# Altium PCB main_board.PcbDoc (part 1 of 2)
Units mm, origin at the board's own origin, x right, y up, seen from the top; angles counter-clockwise.
Board outline 279.4 x 215.91 mm, 2 copper layers (Top Layer, Bottom Layer), stack 2.452 mm thick; 96 components, 340 nets, 967 pads, 108 vias.
Unrouted connection lines stored in the file: 86.
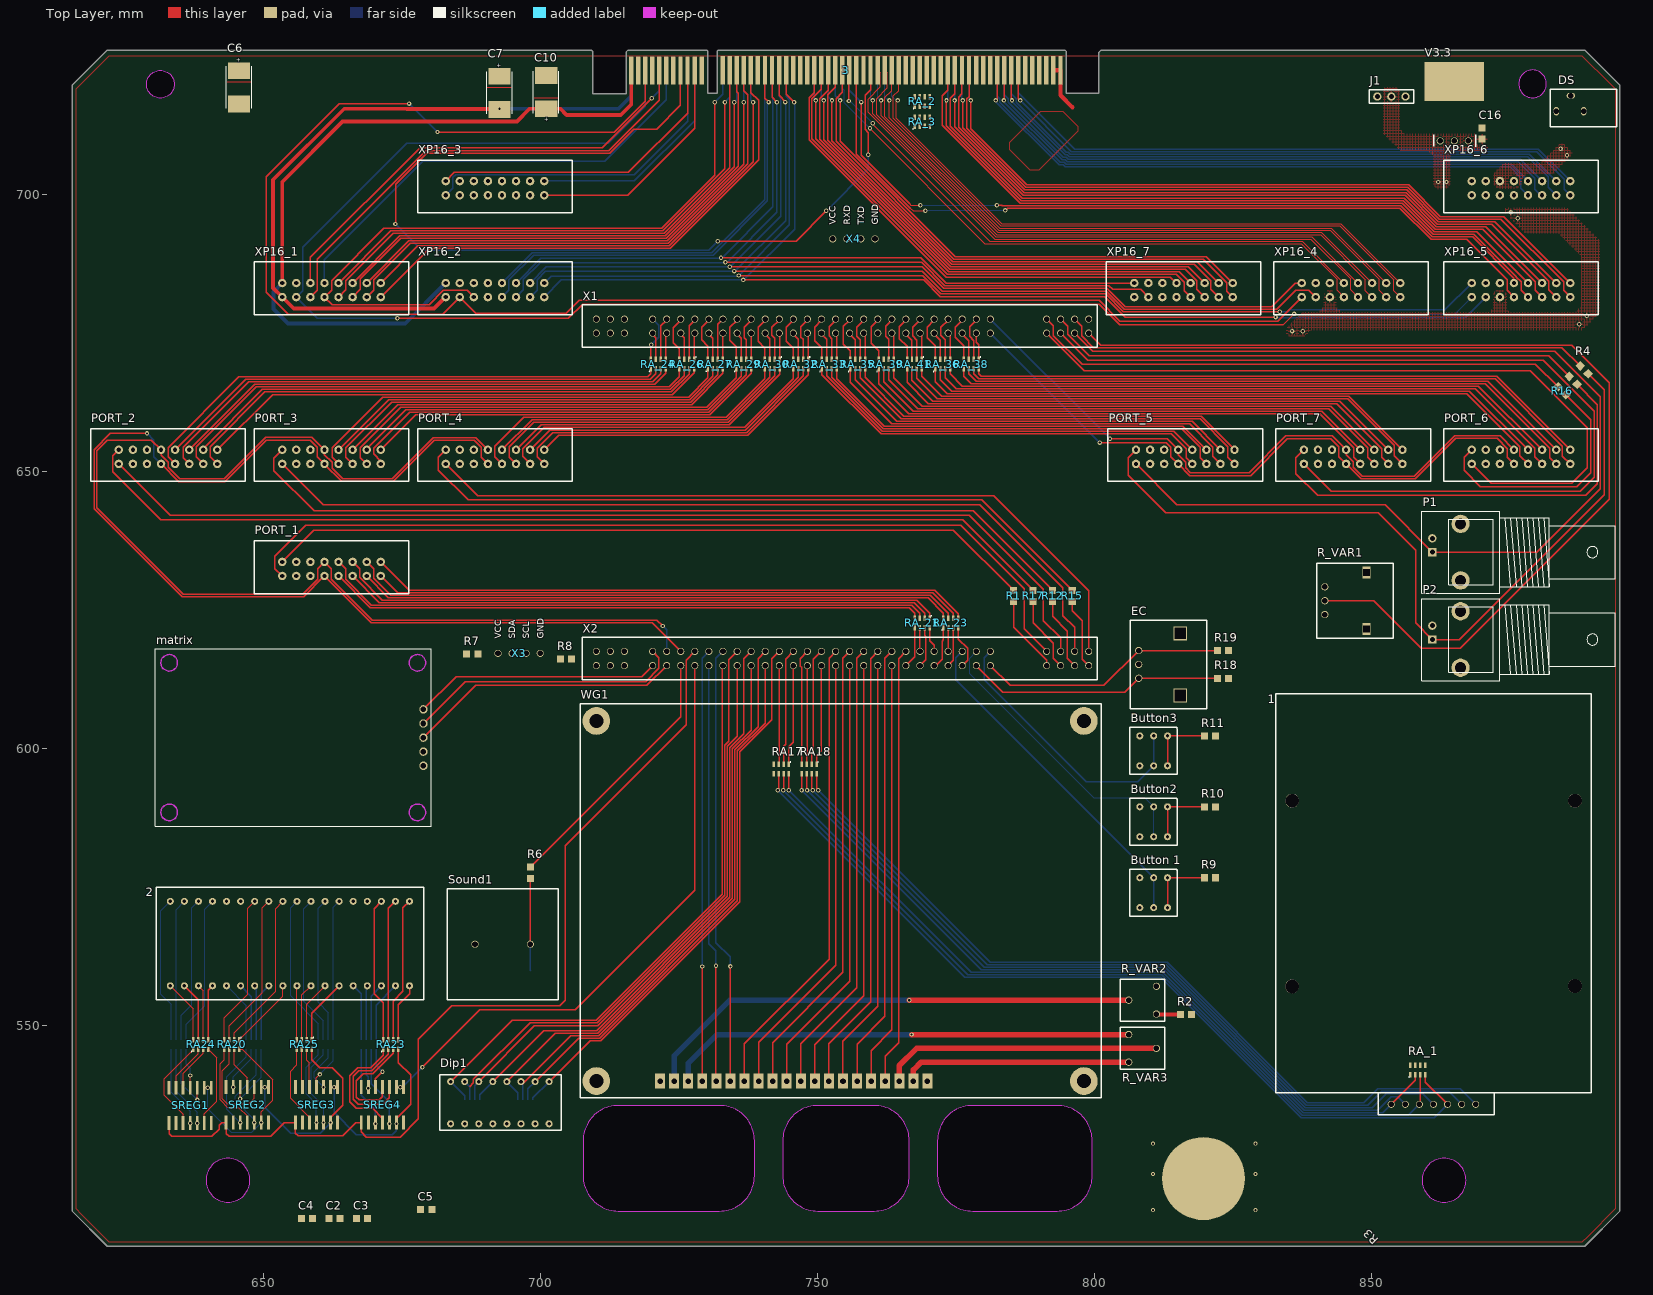
[diagram p0: Top Layer view]
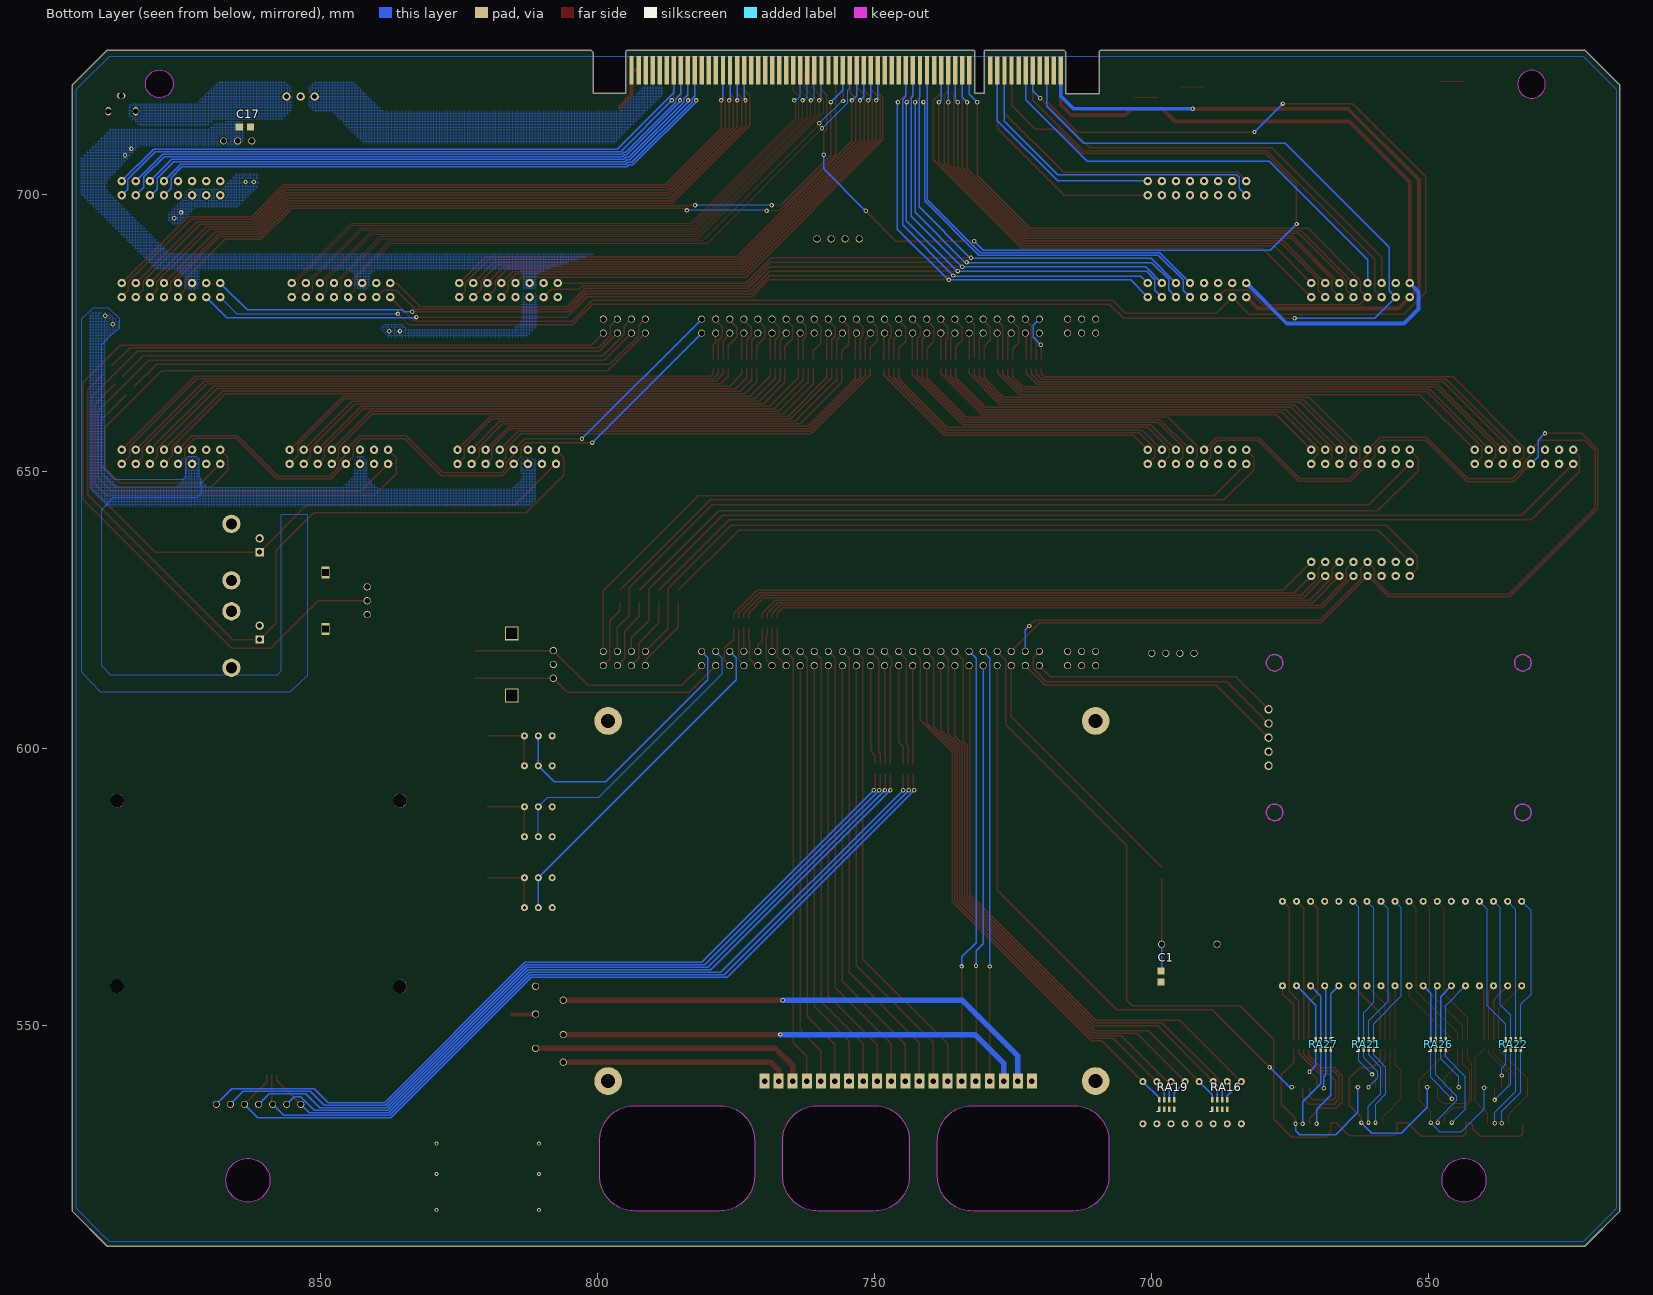
[diagram p1: Bottom Layer view, seen from below]

## Layer stack, top to bottom
Top Solder: solder mask 0.0102, Solder Resist, Dk 3.5
Top Layer: signal copper 0.0356
Dielectric1: core 2, FR-4, Dk 4.8
Dielectric 3: prepreg 0.127, Dk 4.2
Dielectric 2: core 0.254, Dk 4.2
Bottom Layer: signal copper 0.0356
Bottom Solder: solder mask 0.0102, Solder Resist, Dk 3.5

## Board outline
615.365,516.537 621.715,510.187 888.415,510.187 894.765,516.537 894.765,719.737 888.415,726.087 801.117,726.087 800.7,725.67 800.7,718.3 794.8,718.3 794.8,725.9 794.6,726.1 732,726.1 731.8,725.9 731.8,718.3 730.1,718.3 730.1,725.9 729.913,726.087 715.697,726.087 715.445,725.835 715.445,718.217 709.345,718.217 709.345,725.825 709.083,726.087 621.715,726.087 615.365,719.737
cut-out: 859.055,522.097 ccw(c863.015,522.097) 863.015,518.137 ccw(c863.015,522.097) 866.975,522.097 ccw(c863.015,522.097) 863.015,526.057 ccw(c863.015,522.097)
cut-out: 639.555,522.097 ccw(c643.515,522.097) 643.515,518.137 ccw(c643.515,522.097) 647.475,522.097 ccw(c643.515,522.097) 643.515,526.057 ccw(c643.515,522.097)
cut-out: 876.5,720 ccw(c879,720) 879,717.5 ccw(c879,720) 881.5,720 ccw(c879,720) 879,722.5 ccw(c879,720)
cut-out: 771.575,522.887 ccw(c777.925,522.887) 777.925,516.537 793.165,516.537 ccw(c793.165,522.887) 799.515,522.887 799.515,529.237 ccw(c793.165,529.237) 793.165,535.587 777.925,535.587 ccw(c777.925,529.237) 771.575,529.237
cut-out: 743.635,522.887 ccw(c749.985,522.887) 749.985,516.537 760.145,516.537 ccw(c760.145,522.887) 766.495,522.887 766.495,529.237 ccw(c760.145,529.237) 760.145,535.587 749.985,535.587 ccw(c749.985,529.237) 743.635,529.237
cut-out: 713.965,516.537 732.205,516.537 ccw(c732.205,522.887) 738.555,522.887 738.555,529.237 ccw(c732.205,529.237) 732.205,535.587 713.965,535.587 ccw(c713.965,529.237) 707.615,529.237 707.615,522.887 ccw(c713.965,522.887)
cut-out: 631.308,717.426 cw(c631.308,719.926) 628.808,719.926 cw(c631.308,719.926) 631.308,722.426 cw(c631.308,719.926) 633.808,719.926 cw(c631.308,719.926)

## Design rules (kind name [scope] priority, off if disabled: settings)
BoardOutlineClearance [All] p1: gap=0.7 ignorepadtopadclearanceinfootprint=FALSE
Clearance [All] p1: gap=0.2 ignorepadtopadclearanceinfootprint=FALSE except(0: Arc-Hole Track-Hole SMDPad-Hole THPad-Hole Via-Hole Fill-Hole Poly-Hole Region-Hole Text-Hole)
ComponentClearance [All] p1: gap=-1 collisioncheckmode=3 verticalgap=0.254 showdistances=FALSE
HoleSize [All] p1: absolutevalues=TRUE maxlimit=5.1 minlimit=0.3 maxpercent=80.000 minpercent=20.000
MinimumSolderMaskSliver [All] p1: minsoldermaskwidth=0.15
PasteMaskExpansion [All] p1: expansion=0.2
PlaneClearance [All] p1: clearance=0.2
PolygonConnect PolygonConnect_2 [All vs IsNamedPolygon('VCC2.5')] p1: connectstyle=Direct reliefconductorwidth=0.254 reliefentries=4 polygonreliefangle="90 Angle" airgapwidth=0.254
PolygonConnect PolygonConnect_1 [All vs IsNamedPolygon('VCC1.8')] p2: connectstyle=Direct reliefconductorwidth=0.254 reliefentries=4 polygonreliefangle="90 Angle" airgapwidth=0.254
PolygonConnect 3.3connect [All vs IsNamedPolygon('vcc3.3')] p3: connectstyle=Direct reliefconductorwidth=0.254 reliefentries=4 polygonreliefangle="90 Angle" airgapwidth=0.254
PolygonConnect pcon [All vs IsNamedPolygon('GND_Poly')] p4: connectstyle=Direct reliefconductorwidth=0.254 reliefentries=4 polygonreliefangle="90 Angle" airgapwidth=0.254
PolygonConnect poly_connect [All vs IsNamedPolygon('GND_Poly') Or  IsNamedPolygon('VCC5_Polygon')] p5: connectstyle=Direct reliefconductorwidth=0.254 reliefentries=4 polygonreliefangle="90 Angle" airgapwidth=0.254
PolygonConnect [All] p6: connectstyle=Relief reliefconductorwidth=0.254 reliefentries=4 polygonreliefangle="90 Angle" airgapwidth=0.254
RoomDefinition main_connector [InComponentClass('main_connector')] p1: confinementstyle=ConfineOut formatcopy=TRUE lockcomponents=FALSE outline -24.5,-24.5 26.3,-24.5 26.3,0.9 -24.5,0.9
RoutingVias [All] p1: holewidth=0.4 width=0.8 viastyle="Through Hole" minholewidth=0.4 minwidth=0.7 maxholewidth=0.4 maxwidth=0.8
SilkToSolderMaskClearance SilkscreenOverComponentPads [IsPad] p1: minsilkscreentomaskgap=0.254 clearancetoexposedcopper=TRUE
SolderMaskExpansion [All] p1: expansion=0.1
Width Width_VCC3.3 [InNet('VCC3.3')] p1: maxlimit=2 minlimit=0.254 preferedwidth=0.254
Width Width_VCC5 [InNet('VCC5')] p2: maxlimit=2 minlimit=0.2 preferedwidth=0.7 minimp=50.000000 maximp=50.000000 favimp=50.000000
Width [All] p3: maxlimit=2 minlimit=0.2 preferedwidth=0.254
24 further rules are at their usual default settings.

## Classes and differential pairs
component class elv_connector: 3 RA_2 RA_3 XP16_1 XP16_2 XP16_3 XP16_4 XP16_5 XP16_6 XP16_7
component class main_connector: X1 X2
component class board_ports: P0RT_3 P1 P2 PORT_1 PORT_2 PORT_4 PORT_5 PORT_6 PORT_7 R1 R3 R4 R12 R15 R16 R17 RA_21 RA_23 RA_24 RA_26 RA_27 RA_29 RA_30 RA_32 RA_33 RA_35 RA_36 RA_38 RA_39 RA_41
component class power: C6 C7 C10 C16 C17 C18 C19 DS J1 R50 V3.3
component class periphery: 1 Button2 Button3 "Button 1" C1 Dip1 EC matrix R2 R6 R7 R8 R9 R10 R11 R18 R19 R_VAR1 R_VAR2 R_VAR3 RA16 RA17 RA18 RA19 RA_1 Reset Sound1 WG1 X3 X4
component class 7SEG: 2 C2 C3 C4 C5 RA20 RA21 RA22 RA23 RA24 RA25 RA26 RA27 SREG1 SREG2 SREG3 SREG4

## Components (designator, comment, footprint, x,y, rotation, side; value= is the part's Value field where it differs from the comment)
1 "AK207" AK-207 861.1,573.9 r0 top locked
2 "CA56-11EWA" CA56-11EWA 633.1,557.2 r0 top locked
3 "PCI" PCI-120 716.3,722.6 r0 top locked
Button2 "ps850l" ps850l 810.6,586.8 r0 top
Button3 "ps850l" ps850l 810.6,599.6 r0 top
"Button 1" "ps850l" ps850l 810.6,574 r0 top
C1 "CAPACITY" R0805 698.2,557.9 r90 bottom
C2 "CAPACITY" R0805 661.75,515.227 r0 top
C3 "CAPACITY" R0805 666.7,515.227 r0 top
C4 "CAPACITY" R0805 656.799,515.227 r0 top
C5 "CAPACITY" R0805 678.3,516.8 r0 top
C6 "C_Ta" C_Ta 645.5,719.352 r270 top
C7 "C_Ta" C_Ta 692.5,718.363 r270 top
C10 "C_Ta" C_Ta 700.951,718.5 r90 top
C16 "10uF" R0805 869.9,710 r90 top
C17 "10uF" R0805 864.586,712.2 r180 bottom
Dip1 "DIP" SWD1-8 683.7,536.1 r0 top
DS "DS-313a" DS-313 894.2,715.061 r180 top
EC "EC12" EC 807.9,615.2 r270 top
J1 "JUMPER_SWITCH_2S" JUMPER_SWITCH_2S 853.5,717.7 r180 top
matrix "LED_MATRIX" LED_MATRIX 678.8,602 r90 top
P0RT_3 "Вилка_16" DS1013-16 662.2,651.4 r180 top
P1 "BNC" "BNC_RA CON" 860.9,635.471 r180 top locked
P2 "BNC" "BNC_RA CON" 860.9,619.7 r180 top locked
PORT_1 "Вилка_16" DS1013-16 662.2,631.173 r180 top
PORT_2 "Вилка_16" DS1013-16 632.7,651.4 r180 top
PORT_4 "Вилка_16" DS1013-16 691.7,651.4 r180 top
PORT_5 "Вилка_16" DS1013-16 816.3,651.4 r180 top locked
PORT_6 "Вилка_16" DS1013-16 876.9,651.4 r180 top
PORT_7 "Вилка_16" DS1013-16 846.6,651.4 r180 top
R1 "*" R0805 785.3,628.561 r270 top
R2 "*" R0805 815.4,552 r0 top
R3 "*" R0805 887.014,665.771 r135 top
R4 "*" R0805 889.014,667.656 r135 top
R6 "*" R0805 698.1,578.6 r270 top
R7 "*" R0805 686.6,617.1 r0 top
R8 "*" R0805 703.5,616.2 r0 top
R9 "*" R0805 821.8,576.7 r180 top
R10 "*" R0805 821.8,589.5 r180 top
R11 "*" R0805 821.8,602.3 r180 top
R12 "*" R0805 792.367,628.561 r270 top
R15 "*" R0805 795.9,628.561 r270 top
R16 "*" R0805 885.014,663.886 r135 top
R17 "*" R0805 788.833,628.561 r270 top
R18 "*" R0805 822.1,612.7 r0 top
R19 "*" R0805 822.1,617.7 r0 top
R_VAR1 "RV09" RV09 841.5,626.7 r270 top
R_VAR2 "RM065" RM065 811.1,554.6 r90 top
R_VAR3 "RM065" RM065 806.1,545.9 r270 top
RA16 "Bourns CAT16-102J4LF_1" CAT16-102J4_NEW 687.6,535.8 r90 bottom
RA17 "Bourns CAT16-102J4LF_1" CAT16-102J4_NEW 743.4,596.3 r270 top
RA18 "Bourns CAT16-102J4LF_1" CAT16-102J4_NEW 748.4,596.3 r270 top
RA19 "Bourns CAT16-102J4LF_1" CAT16-102J4_NEW 697.2,535.8 r90 bottom
RA20 "Bourns CAT16-102J4LF_1" CAT16-102J4_NEW 644.2,546.6 r270 top
RA21 "Bourns CAT16-102J4LF_1" CAT16-102J4_NEW 661.2,546.6 r90 bottom
RA22 "Bourns CAT16-102J4LF_1" CAT16-102J4_NEW 634.6,546.6 r90 bottom
RA23 "Bourns CAT16-102J4LF_1" CAT16-102J4_NEW 672.9,546.6 r90 top
RA24 "Bourns CAT16-102J4LF_1" CAT16-102J4_NEW 638.6,546.6 r90 top
RA25 "Bourns CAT16-102J4LF_1" CAT16-102J4_NEW 657.3,546.6 r270 top
RA26 "Bourns CAT16-102J4LF_1" CAT16-102J4_NEW 648.2,546.6 r90 bottom
RA27 "Bourns CAT16-102J4LF_1" CAT16-102J4_NEW 668.9,546.6 r270 bottom
RA_1 "Bourns CAT16-102J4LF_1" CAT16-102J4_NEW 858.3,542 r90 top
RA_2 "Bourns CAT16-102J4LF_1" CAT16-102J4_NEW 768.85,716.833 r90 top
RA_3 "Bourns CAT16-102J4LF_1" CAT16-102J4_NEW 768.8,713.154 r90 top
RA_21 "Bourns CAT16-102J4LF_1" CAT16-102J4_NEW 768.8,622.7 r270 top
RA_23 "Bourns CAT16-102J4LF_1" CAT16-102J4_NEW 774,622.7 r90 top
RA_24 "Bourns CAT16-102J4LF_1" CAT16-102J4_NEW 721.2,669.4 r90 top
RA_26 "Bourns CAT16-102J4LF_1" CAT16-102J4_NEW 726.336,669.4 r270 top
RA_27 "Bourns CAT16-102J4LF_1" CAT16-102J4_NEW 731.473,669.4 r90 top
RA_29 "Bourns CAT16-102J4LF_1" CAT16-102J4_NEW 736.609,669.4 r90 top
RA_30 "Bourns CAT16-102J4LF_1" CAT16-102J4_NEW 741.745,669.4 r270 top
RA_32 "Bourns CAT16-102J4LF_1" CAT16-102J4_NEW 746.882,669.4 r270 top
RA_33 "Bourns CAT16-102J4LF_1" CAT16-102J4_NEW 752.018,669.4 r90 top
RA_35 "Bourns CAT16-102J4LF_1" CAT16-102J4_NEW 757.155,669.4 r90 top
RA_36 "Bourns CAT16-102J4LF_1" CAT16-102J4_NEW 772.5,669.4 r90 top
RA_38 "Bourns CAT16-102J4LF_1" CAT16-102J4_NEW 777.7,669.4 r270 top
RA_39 "Bourns CAT16-102J4LF_1" CAT16-102J4_NEW 762.291,669.4 r90 top
RA_41 "Bourns CAT16-102J4LF_1" CAT16-102J4_NEW 767.427,669.4 r270 top
Sound1 "SCS-17-P10" SCS-17-P10 688.1,564.7 r0 top
SREG1 "M74HC595B1R" SN74HC164DRX 640.5,539.5 r180 top
SREG2 "M74HC595B1R" SN74HC164DRX 650.8,539.6 r180 top
SREG3 "M74HC595B1R" SN74HC164DRX 663.3,539.6 r180 top
SREG4 "M74HC595B1R" SN74HC164DRX 675.2,539.6 r180 top
V3.3 "LM1085" LM1085 862.32,709.7 r0 top
WG1 "MT6464b" WG12864A 710,540 r0 top locked
X1 "CONNECTOR_TOP" Connector 710,675 r0 top locked
X2 "CONNECTOR_BOTTOM" Connector 710,615 r0 top locked
X3 "I2C" I2C_CON 692.249,617.2 r0 top
X4 "UART_CON" UART_CON 752.681,692 r0 top
XP16_1 "Вилка_16" DS1013-16 662.2,681.5 r180 top
XP16_2 "Вилка_16" DS1013-16 691.7,681.5 r180 top
XP16_3 "Вилка_16" DS1013-16 691.7,699.9 r180 top
XP16_4 "Вилка_16" DS1013-16 846.21,681.5 r180 top locked
XP16_5 "Вилка_16" DS1013-16 876.9,681.5 r180 top locked
XP16_6 "Вилка_16" DS1013-16 876.9,699.9 r180 top locked
XP16_7 "Вилка_16" DS1013-16 815.992,681.5 r180 top

## Footprints (in the part's own frame and the unit in brackets; to place one, negate y for a bottom-side part, rotate by r counter-clockwise, add the part's x,y. Pads: shape width x height; smd on the part's side, far side on the other; paste and mask are expansions set on the pad)
AK-207 [mm]
  round 1.27 / inner round 1.524 / far side round 1.27 hole 1: 1(-7.62,-38.1) 2(-5.08,-38.1) 3(-2.54,-38.1) 4(0,-38.1) 5(2.54,-38.1) 6(5.08,-38.1) 7(7.62,-38.1)
  round 2.5 hole 2.5 unplated: h1(25.525,-16.75)
  round 2.5 hole 2.5: h2(25.525,16.7) h3(-25.5,16.7) h4(-25.5,-16.8)
  silkscreen extent -28.5,-40 28.5,36
"BNC_RA CON" [mm] "Connector; BNC Elbow"
  rect 1.5x1.5 hole 0.9: 1(0,0)
  round 3.3 hole 2: 2(-5.1,5.1) 2(-5.1,-5.1)
  round 1.5 hole 0.9: 2(0,-2.5)
  silkscreen extent -33,-7.4 1.9,7.4
C_Ta [mm]
  rect 3x4 smd: 1(-3,0) 2(3,0)
  Top Layer lines w0.2: -1.016,-2.159 -1.016,2.159
  silkscreen extent -3.8,-2.3 3.8,2.3, body extent -3.8,-2.3 3.8,2.3, height 4.3
CA56-11EWA [mm]
  round 1.27 / inner round 0.8 / far side round 1.27 hole 0.6: 1(0,0) 2(2.54,0) 3(5.08,0) 4(7.62,0) 5(10.16,0) 6(12.7,0) 7(15.24,0) 8(17.78,0) 9(20.32,0) 10(22.86,0) 11(25.4,0) 12(27.94,0) 13(30.48,0) 14(33.02,0) 15(35.56,0) 16(38.1,0) 17(40.64,0) 18(43.18,0) 19(43.18,15.24) 20(40.64,15.24) 21(38.1,15.24) 22(35.56,15.24) 23(33.02,15.24) 24(30.48,15.24) 25(27.94,15.24) 26(25.4,15.24) 27(22.86,15.24) 28(20.32,15.24) 29(17.78,15.24) 30(15.24,15.24) 31(12.7,15.24) 32(10.16,15.24) 33(7.62,15.24) 34(5.08,15.24) 35(2.54,15.24) 36(0,15.24)
  silkscreen extent -2.54,-2.54 45.72,17.78
CAT16-102J4_NEW [mm] "Resistor Chip Array, Concave, 8-Leads, Pitch 0,90mm,  Body 3,20x1,55mm,  IPC Medium Density"
  rect 1x0.45 smd: 0(-0.85,-1.35) 1(-0.85,-0.45) 2(-0.85,0.45) 3(-0.85,1.35) 4(0.85,1.35) 5(0.85,0.45) 6(0.85,-0.45) 7(0.85,-1.35)
  silkscreen extent -1.34,1.59 -1.24,1.69, body extent -0.9,-1.7 0.9,1.7, height 0.5
Connector [mm] "MCU/FPGA board connector"
  round 1.27 / inner round 0.8 / far side round 1.27 hole 1: 0(0,2.54) 1(2.54,2.54) 2(5.08,2.54) 3(10.16,2.54) 4(12.7,2.54) 5(15.24,2.54) 6(17.78,2.54) 7(20.32,2.54) 8(22.86,2.54) 9(25.4,2.54) 10(27.94,2.54) 11(30.48,2.54) 12(33.02,2.54) 13(35.56,2.54) 14(38.1,2.54) 15(40.64,2.54) 16(43.18,2.54) 17(45.72,2.54) 18(48.26,2.54) 19(50.8,2.54) 20(53.34,2.54) 21(55.88,2.54) 22(58.42,2.54) 23(60.96,2.54) 24(63.5,2.54) 25(66.04,2.54) 26(68.58,2.54) 27(71.12,2.54) 28(81.275,2.54) 29(83.795,2.54) 30(86.325,2.54) 31(88.875,2.54) 32(88.875,0) 33(86.325,0) 34(83.795,0) 35(81.275,0) 36(71.12,0) 37(68.58,0) 38(66.04,0) 39(63.5,0) 40(60.96,0) 41(58.42,0) 42(55.88,0) 43(53.34,0) 44(50.8,0) 45(48.26,0) 46(45.72,0) 47(43.18,0) 48(40.64,0) 49(38.1,0) 50(35.56,0) 51(33.02,0) 52(30.48,0) 53(27.94,0) 54(25.4,0) 55(22.86,0) 56(20.32,0) 57(17.78,0) 58(15.24,0) 59(12.7,0) 60(10.16,0) 61(5.08,0) 62(2.54,0) 63(0,0)
  silkscreen extent -2.54,-2.54 90.42,5.08
DS1013-16 [mil]
  round 60 hole 30: 1(-350,-100) 2(-350,0) 3(-250,-100) 4(-250,0) 5(-150,-100) 6(-150,0) 7(-50,-100) 8(-50,0) 9(50,-100) 10(50,0) 11(150,-100) 12(150,0) 13(250,-100) 14(250,0) 15(350,-100) 16(350,0)
  silkscreen extent -550,-250 550,125
DS-313 [mm]
  oval 1x1.5 / inner round 1.524 / far side oval 1x1.5 hole 1: 0(6,0) 1(10.9,0)
  oval 1.5x1 / inner round 1.524 / far side oval 1.5x1 hole 1: 0(8.3,-2.8)
  silkscreen extent 0,-4 12,2.8
EC [mm] "EC12 rotary encoder"
  rect 2.5x2.5 hole 2 square: 0(-5.6,7.5) 0(5.6,7.5)
  round 1.3 hole 1: 1(-2.5,0) 2(0,0) 3(2.5,0)
  silkscreen extent -8,-1.5 8,12.3
I2C_CON [mm] "I2C pls connector"
  round 1.27 / inner round 1.524 / far side round 1.27 hole 1: 1(0,0) 2(2.54,0) 3(5.08,0) 4(7.62,0)
JUMPER_SWITCH_2S [mm] "2 state jumper switch"
  round 1.5 hole 0.9: 0(0,0) 1(-2.54,0) 2(2.54,0)
  silkscreen extent -4,-1.25 4,1.25
LED_MATRIX [mil]
  round 60 hole 39.37: 1(-200,0) 2(-100,0) 3(0,0) 4(100,0) 5(200,0)
  Keep-Out Layer circle w10: c531.5,1807.09 r59.06
  Keep-Out Layer circle w10: c-531.5,1807.09 r59.06
  Keep-Out Layer circle w10: c531.5,43.31 r59.06
  Keep-Out Layer circle w10: c-531.5,43.31 r59.06
  silkscreen extent -630,-55 630,1906
LM1085 [mm]
  round 1.27 / inner oval 0.4x0.3 / far side round 1.27 hole 1 mask+0.05: 0(0,0) 1(2.54,0) 2(5.08,0)
  rect 10.8x7 smd mask+0.05: 1(2.54,10.7)
  silkscreen extent -1.2,-1.1 6.4,1.14
PCI-120 [mm]
  rect 0.8x5.08 smd mask+0.05: 0(0,-0.2) 1(1.27,-0.2) 2(2.54,-0.2) 3(3.81,-0.2) 4(5.08,-0.2) 5(6.35,-0.2) 6(7.62,-0.2) 7(8.89,-0.2) 8(10.16,-0.2) 9(11.43,-0.2) 10(12.7,-0.2) 11(16.52,-0.14) 12(17.79,-0.14) 13(19.06,-0.14) 14(20.33,-0.14) 15(21.6,-0.14) 16(22.87,-0.14) 17(24.14,-0.14) 18(25.41,-0.14) 19(26.68,-0.14) 20(27.95,-0.14) 21(29.22,-0.14) 22(30.49,-0.14) 23(31.76,-0.14) 24(33.03,-0.14) 25(34.3,-0.14) 26(35.57,-0.14) 27(36.84,-0.14) 28(38.11,-0.14) 29(39.38,-0.14) 30(40.65,-0.14) 31(41.92,-0.14) 32(43.19,-0.14) 33(44.46,-0.14) 34(45.73,-0.14) 35(47,-0.14) 36(48.27,-0.14) 37(49.54,-0.14) 38(50.81,-0.14) 39(52.08,-0.14) 40(53.35,-0.14) 41(54.62,-0.14) 42(55.89,-0.14) 43(57.16,-0.14) 44(58.43,-0.14) 45(59.7,-0.14) 46(60.97,-0.14) 47(62.24,-0.14) 48(63.51,-0.14) 49(64.78,-0.14) 50(66.05,-0.14) 51(67.32,-0.14) 52(68.59,-0.14) 53(69.86,-0.14) 54(71.13,-0.14) 55(72.4,-0.14) 56(73.67,-0.14) 57(74.94,-0.14) 58(76.21,-0.14) 59(77.48,-0.14)
  rect 0.8x5.08 smd far side mask+0.05: 60(77.48,-0.14) 61(76.21,-0.14) 62(74.94,-0.14) 63(73.67,-0.14) 64(72.4,-0.14) 65(71.13,-0.14) 66(69.86,-0.14) 67(68.59,-0.14) 68(67.32,-0.14) 69(66.05,-0.14) 70(64.78,-0.14) 71(63.5,-0.14) 72(62.24,-0.14) 73(60.97,-0.14) 74(59.7,-0.14) 75(58.43,-0.14) 76(57.16,-0.14) 77(55.89,-0.14) 78(54.62,-0.14) 79(53.35,-0.14) 80(52.08,-0.14) 81(50.81,-0.14) 82(49.54,-0.14) 83(48.27,-0.14) 84(47,-0.14) 85(45.73,-0.14) 86(44.46,-0.14) 87(43.19,-0.14) 88(41.92,-0.14) 89(40.65,-0.14) 90(39.38,-0.14) 91(38.11,-0.14) 92(36.84,-0.14) 93(35.57,-0.14) 94(34.3,-0.14) 95(33.03,-0.14) 96(31.76,-0.14) 97(30.49,-0.14) 98(29.22,-0.14) 99(27.95,-0.14) 100(26.68,-0.14) 101(25.41,-0.14) 102(24.14,-0.14) 103(22.87,-0.14) 104(21.6,-0.14) 105(20.33,-0.14) 106(19.06,-0.14) 107(17.79,-0.14) 108(16.52,-0.14) 109(12.7,-0.2) 110(11.43,-0.2) 111(10.16,-0.2) 112(8.89,-0.2) 113(7.62,-0.2) 114(6.35,-0.2) 115(5.08,-0.2) 116(3.81,-0.2) 117(2.54,-0.2) 118(1.27,-0.2) 119(0,-0.2)
ps850l [mm]
  round 1.27 / inner round 1.524 / far side round 1.27 hole 0.6: 1(-2.5,2.7) 2(0,2.7) 3(2.5,2.7) 4(-2.5,-2.7) 5(0,-2.7) 6(2.5,-2.7)
  silkscreen extent -4.28,-4.25 4.28,4.25
R0805 [mm]
  rect 1.27x1.27 smd: 1(0,0) 2(2,0)
RM065 [mm] "trimming potentiometer"
  round 1.3 hole 1: 1(-2.5,0) 2(0,5) 3(2.5,0)
  silkscreen extent -3.8,-1.5 3.8,6.5
RV09 [mm] "RV09 potentiometer"
  round 1.3 hole 1: 1(-2.5,0) 2(0,0) 3(2.5,0)
  rect 2.1x1.5 hole 1.2 square: 4(-5.1,7.5) 5(5.1,7.5)
  silkscreen extent -6.8,-1.5 6.8,12.3
SCS-17-P10 [mm]
  round 1.27 / inner oval 0.4x0.3 / far side round 1.27 hole 1 mask+0.05: 0(0,0) 1(10,0)
  silkscreen extent -5,-10 15,10
SN74HC164DRX [mm]
  rect 0.51x2.5 smd mask+0.05: 1(0,0.7) 2(1.27,0.7) 3(2.54,0.7) 4(3.81,0.7) 5(5.08,0.7) 6(6.35,0.7) 7(7.62,0.7) 8(7.62,7.1) 9(6.35,7.1) 10(5.08,7.1) 11(3.81,7.1) 12(2.54,7.1) 13(1.27,7.1) 14(0,7.1)
SWD1-8 [mm]
  round 1.27 / inner round 0.8 / far side round 1.27 hole 0.65: 1(0,3.81) 2(2.54,3.81) 3(5.08,3.81) 4(7.62,3.81) 5(10.16,3.81) 6(12.7,3.81) 7(15.24,3.81) 8(17.78,3.81) 9(17.78,-3.81) 10(15.24,-3.81) 11(12.7,-3.81) 12(10.16,-3.81) 13(7.62,-3.81) 14(5.08,-3.81) 15(2.54,-3.81) 16(0,-3.81)
  silkscreen extent -2,-5 20,5
UART_CON [mm] "pls uart connector"
  round 1.27 / inner round 1.524 / far side round 1.27 hole 1: 1(0,0) 2(2.54,0) 3(5.08,0) 4(7.62,0)
WG12864A [mm]
  rect 1.8x2.75 hole 1 paste+0: 0(59.76,0)
  rect 1.8x2.75 hole 1: 1(57.22,0) 2(54.68,0) 3(52.14,0) 4(49.6,0) 5(47.06,0) 6(44.52,0) 7(41.98,0) 8(39.44,0) 9(36.9,0) 10(34.36,0) 11(31.82,0) 12(29.28,0) 13(26.74,0) 14(24.2,0) 15(21.66,0) 16(19.12,0) 17(16.58,0) 18(14.04,0) 19(11.5,0)
  round 5 hole 2.5 unplated: hole(0,65) hole4(0,0)
  round 5 hole 2.5: hole1(88,65) hole2(88,0)
  silkscreen extent -2.9,-3 91.1,68.1

## Part data
1: library part AK-207
C6 C7 C10: "tantalum capacitor"
C16 C17: library part CAPACITY, capacity=10uF
EC: "EC12 rotary encoder"
J1: "2 state jumper switch"
matrix: "led matrix, max7219 driver"
P0RT_3 PORT_1 PORT_2 PORT_4 PORT_5 PORT_6 PORT_7 XP16_1 XP16_2 XP16_3 XP16_4 XP16_5 XP16_6 XP16_7: library part DS1013-16, "16_pin"
P1 P2: "BNC Elbow Connector", LatestRevisionDate=17-Jul-2002, LatestRevisionNote="Re-released for DXP Platform.", Publisher="Altium Limited"
R1 R2 R3 R4 R6 R7 R8 R9 R10 R11 R12 R15 R16 R17 R18 R19: library part R0805
R_VAR2 R_VAR3: "trimming potentiometer"
X1 X2: "control board connector"
X3: library part I2C_CON, "i2c pls connector"
X4: "pls uart connector"

## Free pads (board coordinates)
  round 15 smd: discharge(819.6,522.4)

## Via types
v1: diameter 0.8, hole 0.4, Top Layer to Bottom Layer, 102 vias
v2: diameter 0.7, hole 0.4, Top Layer to Bottom Layer, 6 vias

## Nets (pads, with @x,y where several pads share a name; then routed paths per layer and width w, separated by ;. In a path a pad name is that pad's centre, name@x,y a point inside that pad or via, vN(x,y) a via of type N, cw(c..) or ccw(c..) an arc to the next point about the centre after c; other vN are vias at no path point)
5VREF: 3.7 3.32 XP16_2.11 | length 182.6
  Top Layer w0.254: v1(673.744,694.7) 673.79,694.746 673.79,701.884 679.392,707.487 712.429,707.487 716.742,711.8 720.9,711.8 725.19,716.09 3.7@725.19,722.4 ; v1(731.9,691.6) 746.049,691.6 751.5,697.051 v1(751.5,697.1) ; v1(759.1,707.2) 759.1,711.197 758.527,711.77 758.527,717.927 759.49,718.89 3.32@759.49,722.46
  Bottom Layer w0.254: v1(673.744,694.7) 678.444,690 730.3,690 v1(731.9,691.6) ; v1(751.5,697.1) 751.549,697.1 759.1,704.651 v1(759.1,707.2)
7SEG_CLK: SREG1.8 SREG2.8 SREG3.8 SREG4.8 X2.6 | length 174.7
  Top Layer w0.254: SREG1.8@632.88,532.4 632.88,530.52 633.4,530 640.6,530 641.9,531.3 641.9,532 642.4,532.5 SREG2.8@643.18,532.5 643.18,530.52 643.7,530 651.2,530 653.7,532.5 SREG3.8@655.68,532.5 655.68,530.62 656.2,530.1 664.2,530.1 666.6,532.5 SREG4.8@667.58,532.5 667.58,530.82 668.5,529.9 674.6,529.9 677.873,533.173 677.873,547.573 683.9,553.6 703.4,553.6 704.4,554.6 704.4,582.5 726.202,604.302 726.202,615.962 X2.6@727.78,617.54
7SEG_DATA: SREG4.1 SREG4.2 X2.57 | length 109.1
  Top Layer w0.254: SREG4.2@673.93,538.9 v1(674.6,538.9) ; v1(678.6,542.5) 689,552.9 706.2,552.9 727.78,574.48 X2.57@727.78,615
  Bottom Layer w0.254: v1(674.6,538.9) 675,538.9 v1(678.6,542.5)
A1: RA22.2 SREG1.3 | length 12.6
  Top Layer w0.2: SREG1.3@637.96,538.8 637.96,536.64 v1(638,536.6)
  Bottom Layer w0.2: RA22.2@635.05,545.75 635.05,539.55 v1(638,536.6)
A2: RA20.6 SREG2.3 | length 18.1
  Top Layer w0.2: RA20.6@643.75,545.75 643.75,543.15 642.5,541.9 642.5,536.766 643.366,535.9 647.3,535.9 648.26,536.86 SREG2.3@648.26,538.9
A3: RA21.2 SREG3.3 | length 8.6
  Bottom Layer w0.2: v1(660.76,538.9) 659.1,540.56 659.1,541.7 661.65,544.25 RA21.2@661.65,545.75
A4: RA23.2 SREG4.3 | length 22.2
  Top Layer w0.254: RA23.2@672.45,545.75 672.45,544.85 669.5,541.9 667.1,541.9 666.1,540.9 666.1,536.7 667,535.8 671.5,535.8 672.66,536.96 SREG4.3@672.66,538.7
AI1: PORT_1.16 X2.28 | length 159.4
  Top Layer w0.254: PORT_1.16@653.31,631.173 651.979,632.504 651.979,634.737 657.542,640.3 775.8,640.3 787.2,628.9 787.2,621.615 X2.28@791.275,617.54
AI2: PORT_2.16 X2.29 | length 188.8
  Top Layer w0.254: PORT_2.16@623.81,651.4 633.077,642.133 777.318,642.133 790.645,628.807 790.645,623.126 793.795,619.976 X2.29@793.795,617.54
AI3: P0RT_3.16 X2.30 | length 162.5
  Top Layer w0.254: P0RT_3.16@653.31,651.4 660.71,644 779.221,644 794.218,629.003 794.218,623.982 796.325,621.875 X2.30@796.325,617.54
AI4: PORT_4.16 X2.31 | length 136.5
  Top Layer w0.254: PORT_4.16@682.81,651.4 688.569,645.641 781.713,645.641 798.875,628.479 X2.31@798.875,617.54
AI6: PORT_7.16 X1.34 | length 169.5
  Top Layer w0.254: X1.34@793.795,675 798.695,670.1 880.9,670.1 890.1,660.9 890.1,649 887.6,646.5 842.61,646.5 PORT_7.16@837.71,651.4
AI7: PORT_6.16 X1.35 | length 135.4
  Top Layer w0.254: X1.35@791.275,675 798.075,668.2 878.6,668.2 888.885,657.915 888.885,650.685 886.1,647.9 871.51,647.9 PORT_6.16@868.01,651.4
AO1: R1.2 X2.35 | length 14
  Top Layer w0.254: R1.2@785.3,626.561 785.3,621.938 791.275,615.963 X2.35@791.275,615
AO2: R17.2 X2.34 | length 13.6
  Top Layer w0.254: R17.2@788.833,626.561 788.833,622.716 792.5,619.049 792.5,616.295 X2.34@793.795,615
AO3: R12.2 X2.33 | length 13.2
  Top Layer w0.254: R12.2@792.367,626.561 792.367,623.854 794.986,621.235 794.986,616.339 X2.33@796.325,615
AO4: R15.2 X2.32 | length 12.8
  Top Layer w0.254: R15.2@795.9,626.561 795.9,624.879 797.7,623.079 797.7,616.175 X2.32@798.875,615
AO6: R3.2 X1.29 | length 97
  Top Layer w0.254: X1.29@793.795,677.54 795.075,676.26 795.075,674.775 798.95,670.9 881.885,670.9 R3.2@885.6,667.185
AO7: R16.2 X1.28 | length 98.4
  Top Layer w0.254: X1.28@791.275,677.54 792.5,676.315 792.5,674.569 797.669,669.4 879.5,669.4 R16.2@883.6,665.3
B1: RA22.3 SREG1.4 | length 7.3
  Top Layer w0.2: SREG1.4@636.69,538.8 636.7,538.81 v1(636.7,541)
  Bottom Layer w0.2: RA22.3@635.95,545.75 635.95,543.05 636.7,542.3 v1(636.7,541)
B2: RA20.5 SREG2.4 | length 7.8
  Top Layer w0.2: RA20.5@644.65,545.75 644.65,542.95 646.99,540.61 SREG2.4@646.99,538.9
B3: RA21.3 SREG3.4 | length 8.1
  Top Layer w0.2: SREG3.4@659.49,538.9 659.49,540.59 v1(660.1,541.2)
  Bottom Layer w0.2: v1(660.1,541.2) 662.55,543.65 RA21.3@662.55,545.75
B4: RA23.1 SREG4.4 | length 19.1
  Top Layer w0.254: SREG4.4@671.39,538.7 671.39,537.19 670.8,536.6 667.2,536.6 666.7,537.1 666.7,540.1 667.9,541.3 669.6,541.3 673.35,545.05 RA23.1@673.35,545.75
BNC_AI: P1.1 PORT_5.16 X1.33 | length 211.3
  Top Layer w0.254: X1.33@796.325,675 799.625,671.7 883,671.7 891.2,663.5 891.2,646.937 879.734,635.471 P1.1@860.9,635.471 852.371,644 814.81,644 PORT_5.16@807.41,651.4
BNC_AO: R4.2 X1.30 | length 95.8
  Top Layer w0.254: X1.30@796.325,677.54 797.6,676.265 797.6,674.5 799.7,672.4 884.27,672.4 R4.2@887.6,669.07
BUTTON_1_OUT: "Button 1.2" "Button 1.5" X2.25 | length 61.5
  Bottom Layer w0.254: X2.25@776.04,617.54 774.9,616.4 774.9,612.4 810.6,576.7 810.6,571.3
BUTTON_2_OUT: Button2.2 Button2.5 X2.26 | length 53.1
  Bottom Layer w0.2: X2.26@778.58,617.54 777.4,616.36 777.4,613.5 799.8,591.1 809,591.1 Button2.2@810.6,589.5 Button2.5@810.6,584.1
BUTTON_3_OUT: Button3.2 Button3.5 X2.27 | length 50.4
  Bottom Layer w0.254: X2.27@781.12,617.54 780,616.42 780,612.4 798.4,594 807.7,594 Button3.5@810.6,596.9 Button3.2@810.6,602.3
C1: RA24.1 SREG1.5 | length 8.5
  Top Layer w0.2: SREG1.5@635.42,538.8 635.42,541.42 639.05,545.05 RA24.1@639.05,545.75
C2: RA26.3 SREG2.5 | length 12.7
  Top Layer w0.2: v1(645.7,536.8) 645.7,538.88 SREG2.5@645.72,538.9
  Bottom Layer w0.2: v1(645.7,536.8) 649.55,540.65 RA26.3@649.55,545.75
C3: RA25.5 SREG3.5 | length 7
  Top Layer w0.2: RA25.5@657.75,545.75 657.75,543.75 658.22,543.28 SREG3.5@658.22,538.9
C4: RA27.7 SREG4.5 | length 8.1
  Top Layer w0.254: SREG4.5@670.12,538.7 670.12,540.42 v1(671.4,541.7)
  Bottom Layer w0.254: RA27.7@670.25,545.75 670.25,542.85 v1(671.4,541.7)
D1: RA24.2 SREG1.6 | length 8.6
  Top Layer w0.2: SREG1.6@634.15,538.8 634.15,540.95 638.15,544.95 RA24.2@638.15,545.75
D2: RA26.1 SREG2.6 | length 8.2
  Bottom Layer w0.2: v1(644.45,538.9) 644.45,540.75 647.75,544.05 RA26.1@647.75,545.75
D3: RA25.6 SREG3.6 | length 6.8
  Top Layer w0.2: SREG3.6@656.85,539 RA25.6@656.85,545.75
D4: RA27.5 SREG4.6 | length 7.2
  Bottom Layer w0.254: RA27.5@668.45,545.75 668.45,541.15 668.85,540.75 v1(668.85,538.7)
DIP_OUT_0: Dip1.1 RA16.7 X2.55 | length 108.7
  Top Layer w0.254: Dip1.1@683.7,539.91 694.786,550.996 710.002,550.996 732.722,573.716 732.722,614.862 X2.55@732.86,615
  Bottom Layer w0.254: Dip1.1@683.7,539.91 686.25,537.36 RA16.7@686.25,536.65
DIP_OUT_1: Dip1.2 RA16.6 X2.9 | length 109.3
  Top Layer w0.254: 687.15,539 687.818,539.668 687.818,540.308 698.052,550.542 710.19,550.542 733.176,573.528 733.176,600.626 733.876,601.326 733.876,616.016 X2.9@735.4,617.54
  Bottom Layer w0.254: Dip1.2@686.24,539.91 687.15,539 RA16.6@687.15,536.65
DIP_OUT_2: Dip1.3 RA16.5 X2.54 | length 104.7
  Top Layer w0.254: Dip1.3@688.78,539.91 698.83,549.96 710.25,549.96 733.63,573.34 733.63,600.438 735.4,602.208 X2.54@735.4,615
  Bottom Layer w0.254: RA16.5@688.05,536.65 688.05,539.18 Dip1.3@688.78,539.91
DIP_OUT_3: Dip1.4 RA16.4 X2.10 | length 106.8
  Top Layer w0.254: Dip1.4@691.32,539.91 700.526,549.116 710.048,549.116 734.084,573.152 734.084,600.152 736.6,602.668 736.6,616.2 X2.10@737.94,617.54
  Bottom Layer w0.254: RA16.4@688.95,536.65 688.95,537.54 Dip1.4@691.32,539.91
DIP_OUT_4: Dip1.5 RA19.7 X2.53 | length 101.9
  Top Layer w0.254: Dip1.5@693.86,539.91 702.612,548.662 710.236,548.662 734.538,572.964 734.538,599.964 737.94,603.366 X2.53@737.94,615
  Bottom Layer w0.254: Dip1.5@693.86,539.91 695.85,537.92 RA19.7@695.85,536.65
DIP_OUT_5: Dip1.6 RA19.6 X2.11 | length 102.4
  Top Layer w0.254: Dip1.6@696.75,539.56 705.398,548.208 710.424,548.208 734.992,572.776 734.992,599.776 739.2,603.984 739.2,616.26 X2.11@740.48,617.54
  Bottom Layer w0.254: Dip1.6@696.4,539.91 696.75,539.56 RA19.6@696.75,536.65
DIP_OUT_6: Dip1.7 RA19.5 X2.52 | length 98.3
  Top Layer w0.254: Dip1.7@698.94,539.91 706.784,547.754 710.612,547.754 735.446,572.588 735.446,599.588 740.48,604.622 X2.52@740.48,615
  Bottom Layer w0.254: RA19.5@697.65,536.65 697.65,538.62 Dip1.7@698.94,539.91
DIP_OUT_7: Dip1.8 RA19.4 X2.12 | length 100.4
  Top Layer w0.254: Dip1.8@701.48,539.91 708.87,547.3 710.8,547.3 735.9,572.4 735.9,599.4 741.7,605.2 741.7,616.22 X2.12@743.02,617.54
  Bottom Layer w0.254: RA19.4@698.55,536.65 698.55,536.98 Dip1.8@701.48,539.91
DP2: 2.9 RA20.3 | length 13
  Top Layer w0.2: RA20.3@645.55,547.45 653.42,555.32 2.9@653.42,557.2
E1: RA24.3 SREG1.10 | length 16.9
  Top Layer w0.2: SREG1.10@635.42,532.4 635.42,533.98 632,537.4 632,540.4 637.25,545.65 RA24.3@637.25,545.75
E2: RA26.0 SREG2.10 | length 15.7
  Bottom Layer w0.2: v1(645.72,532.5) 643.3,534.92 643.3,540.8 646.85,544.35 RA26.0@646.85,545.75
E3: RA25.7 SREG3.10 | length 15.1
  Top Layer w0.2: RA25.7@655.95,545.75 655.95,542.95 654.8,541.8 654.8,536.9 658.22,533.48 SREG3.10@658.22,532.5
E4: RA27.4 SREG4.10 | length 14.5
  Bottom Layer w0.254: RA27.4@667.55,545.75 667.55,537.45 670.12,534.88 v1(670.12,532.3)
E_+15: 3.60 3.61 R2.2
E_-15: 3.58 3.59 | length 8.8
  Top Layer w0.8: 3.58@792.51,722.46 3.59@793.7,722.46 ; 3.59@793.78,722.46 793.78,717.92 795.954,715.746
E_AM: 3.8 XP16_3.15 | length 56.4
  Top Layer w0.254: XP16_3.15@682.81,702.44 684.37,704 715.762,704 726.46,714.698 3.8@726.46,722.4
E_AO0: 3.117 XP16_1.14 XP16_5.16 | length 306.7
  Top Layer w0.2: 833.9,676.492 833.967,676.492 v1(835.95,678.475)
  Top Layer w0.254: v1(674.1,677.692) 704.976,677.692 707.542,680.258 800.742,680.258 804.508,676.492 833.9,676.492
  Bottom Layer w0.2: v1(835.95,678.475) 835.977,678.448 864.923,678.448 867.975,681.5 XP16_5.16@868.01,681.5
  Bottom Layer w0.254: v1(674.1,677.692) 659.658,677.692 XP16_1.14@655.85,681.5 657,682.65 657,690.483 675.755,709.238 712.112,709.238 718.84,715.966 3.117@718.84,722.4
E_AO1: 3.2 XP16_2.14 XP16_4.16 | length 300
  Top Layer w0.254: v1(676.2,716.432) 676.168,716.4 663.615,716.4 650.4,703.185 650.4,682.4 654.4,678.4 673.78,678.4 673.799,678.419 674.401,678.419 674.42,678.4 682.25,678.4 XP16_2.14@685.35,681.5 688.25,678.6 704.6,678.6 706.9,680.9 800.742,680.9 804.47,677.172 832.992,677.172 XP16_4.16@837.32,681.5 ; v1(681.332,711.3) 713.258,711.3 718.84,716.882 3.2@718.84,722.4
  Bottom Layer w0.254: v1(676.2,716.432) v1(681.332,711.3)
E_BASE: 3.115 XP16_1.11 | length 83.7
  Top Layer w0.254: XP16_1.11@658.39,684.04 658.39,688.69 678.2,708.5 711.1,708.5 v1(720,717.4)
  Bottom Layer w0.254: v1(720,717.4) 721.38,718.78 3.115@721.38,722.4
E_DIO_0: 3.69 XP16_6.7 | length 107.2
  Bottom Layer w0.254: 3.69@782.35,722.46 782.35,717.791 782.84,717.301 782.84,716.699 793.705,705.834 794.456,705.834 794.789,705.501 875.109,705.501 XP16_6.7@878.17,702.44
E_DIO_1: 3.50 XP16_6.8 | length 109.9
  Top Layer w0.254: v1(782.1,717) 782.35,717.25 3.50@782.35,722.46
  Bottom Layer w0.254: v1(782.1,717) 782.1,716.796 793.516,705.38 794.268,705.38 794.601,705.047 874.921,705.047 876.9,703.068 876.9,701.17 XP16_6.8@878.17,699.9
E_DIO_2: 3.68 XP16_6.5 | length 108.4
  Bottom Layer w0.254: 3.68@783.62,722.46 783.62,718.016 784.306,717.33 784.306,716.699 794.263,706.742 794.832,706.742 795.165,706.409 876.741,706.409 XP16_6.5@880.71,702.44
E_DIO_3: 3.51 XP16_6.6 | length 111
  Top Layer w0.254: v1(783.567,717) 783.62,717.053 3.51@783.62,722.46
  Bottom Layer w0.254: v1(783.567,717) 783.567,716.796 794.075,706.288 794.644,706.288 794.977,705.955 876.445,705.955 879.4,703 879.4,701 880.5,699.9 XP16_6.6@880.71,699.9
E_DIO_4: 3.67 XP16_6.3 | length 109.5
  Bottom Layer w0.254: 3.67@784.89,722.46 784.89,718.171 785.76,717.301 785.76,716.712 794.822,707.65 795.208,707.65 795.541,707.317 878.373,707.317 XP16_6.3@883.25,702.44
E_DIO_5: 3.52 XP16_6.4 | length 112
  Top Layer w0.254: 3.52@784.89,722.46 784.89,717.143 v1(785.033,717)
  Bottom Layer w0.254: v1(785.033,717) 785.033,716.796 794.634,707.196 795.02,707.196 795.353,706.863 878.137,706.863 881.799,703.201 881.799,701.351 XP16_6.4@883.25,699.9
E_DIO_6: 3.66 XP16_6.1 | length 110.3
  Bottom Layer w0.254: 3.66@786.16,722.46 786.16,718.408 796.343,708.225 880.055,708.225 885.79,702.49 XP16_6.1@885.79,702.44
E_DIO_7: 3.53 XP16_6.2 | length 113
  Top Layer w0.254: 3.53@786.16,722.46 786.16,717.34 v1(786.5,717)
  Bottom Layer w0.254: v1(786.5,717) 795.729,707.771 879.729,707.771 884.701,702.799 884.701,700.989 XP16_6.2@885.79,699.9
E_DIO_8: 3.76 XP16_5.7 | length 126.9
  Top Layer w0.254: v1(773.2,717) 773.2,712.448 786.71,698.938 855.613,698.938 861.242,693.309 868.901,693.309 XP16_5.7@878.17,684.04
  Bottom Layer w0.254: v1(773.2,717) 773.46,717.26 3.76@773.46,722.46
E_DIO_9: 3.43 XP16_5.8 | length 129.8
  Top Layer w0.254: 3.43@773.46,722.46 773.46,718.86 772.473,717.873 772.473,712.533 786.522,698.484 855.425,698.484 861.054,692.855 868.368,692.855 876.084,685.14 876.084,685.126 876.925,684.285 876.925,682.745 XP16_5.8@878.17,681.5
E_DIO_10: 3.75 XP16_5.5 | length 128
  Top Layer w0.254: v1(774.667,717) 774.667,712.265 787.086,699.846 855.989,699.846 861.618,694.217 870.533,694.217 XP16_5.5@880.71,684.04
  Bottom Layer w0.254: v1(774.667,717) 774.73,717.063 3.75@774.73,722.46
E_DIO_11: 3.44 XP16_5.6 | length 130.9
  Top Layer w0.254: 3.44@774.73,722.46 774.73,718.236 773.927,717.433 773.927,712.363 786.898,699.392 855.801,699.392 861.43,693.763 869.987,693.763 879.45,684.3 879.45,682.76 XP16_5.6@880.71,681.5
E_DIO_12: 3.74 XP16_5.3 | length 129.2
  Top Layer w0.254: v1(776.133,717) 776.133,712.083 787.359,700.857 856.263,700.857 861.994,695.125 872.165,695.125 XP16_5.3@883.25,684.04
  Bottom Layer w0.254: 3.74@776,722.46 776,717.133 v1(776.133,717)
E_DIO_13: 3.45 XP16_5.4 | length 132
  Top Layer w0.254: 3.45@776,722.46 776,718.2 775.4,717.6 775.4,712.174 787.274,700.3 856.177,700.3 861.806,694.671 871.619,694.671 881.95,684.34 881.95,682.8 XP16_5.4@883.25,681.5
E_DIO_14: 3.73 XP16_5.1 | length 130.4
  Top Layer w0.254: v1(777.6,717) 777.6,711.9 787.7,701.8 856.603,701.8 862.37,696.033 873.797,696.033 XP16_5.1@885.79,684.04
  Bottom Layer w0.254: 3.73@777.27,722.46 777.27,717.33 v1(777.6,717)
E_DIO_15: 3.46 XP16_5.2 | length 133.1
  Top Layer w0.254: 3.46@777.27,722.46 777.27,717.698 776.873,717.301 776.873,711.985 787.534,701.324 856.438,701.324 862.182,695.579 873.251,695.579 884.575,684.255 884.575,682.715 XP16_5.2@885.79,681.5
E_DIO_16: 3.87 XP16_4.7 | length 108.4
  Top Layer w0.2: v1(759.898,716.999) 759.898,714.589 782.112,692.375 839.145,692.375 XP16_4.7@847.48,684.04
  Bottom Layer w0.2: 3.87@759.49,722.46 759.49,717.21 759.701,716.999 v1(759.898,716.999)
E_DIO_17: 3.33 XP16_4.8 | length 112.1
  Top Layer w0.2: 3.33@760.76,722.46 761.26,721.96 761.26,719.45 759.05,717.24 759.05,714.872 781.947,691.975 838.979,691.975 846.175,684.779 846.175,682.805 XP16_4.8@847.48,681.5
E_DIO_18: 3.86 XP16_4.5 | length 109.8
  Top Layer w0.2: v1(761.398,716.999) 761.398,714.22 782.444,693.175 840.885,693.175 XP16_4.5@850.02,684.04
  Bottom Layer w0.2: 3.86@760.76,722.46 760.76,717.407 761.168,716.999 v1(761.398,716.999)
E_DIO_19: 3.34 XP16_4.6 | length 113.2
  Top Layer w0.2: 3.34@762.03,722.46 762.53,721.96 762.53,719.253 760.598,717.322 760.598,714.454 782.278,692.775 840.719,692.775 848.825,684.669 848.825,682.695 XP16_4.6@850.02,681.5
E_DIO_20: 3.85 XP16_4.3 | length 111.1
  Top Layer w0.2: v1(762.898,716.999) 762.898,713.852 782.775,693.975 842.625,693.975 XP16_4.3@852.56,684.04
  Bottom Layer w0.2: 3.85@762.03,722.46 762.03,717.603 762.635,716.999 v1(762.898,716.999)
E_DIO_21: 3.35 XP16_4.4 | length 114
  Top Layer w0.2: 3.35@763.3,722.46 763.3,718.787 762.098,717.585 762.098,714.086 782.609,693.575 842.459,693.575 851.3,684.734 851.3,682.76 XP16_4.4@852.56,681.5
E_DIO_22: 3.84 XP16_4.1 | length 112.8
  Top Layer w0.2: v1(764.398,716.999) 764.199,716.999 764.1,716.9 764.1,713.825 783.15,694.775 844.365,694.775 XP16_4.1@855.1,684.04
  Bottom Layer w0.2: 3.84@763.3,722.46 763.3,717.8 764.101,716.999 v1(764.398,716.999)
E_DIO_23: 3.36 XP16_4.2 | length 115.1
  Top Layer w0.2: 3.36@764.57,722.46 764.57,718.795 763.598,717.823 763.598,713.761 782.984,694.375 844.199,694.375 853.95,684.624 853.95,682.65 XP16_4.2@855.1,681.5
E_DUT+: 3.4 XP16_1.12 | length 86.3
  Top Layer w0.254: XP16_1.12@658.39,681.5 659.637,682.747 659.637,688.374 679.204,707.941 712.241,707.941 721.38,717.08 3.4@721.38,722.4
E_DUT-: 3.114 XP16_1.9 | length 83.2
  Bottom Layer w0.254: XP16_1.9@660.93,684.04 660.93,688.23 678.7,706 711.52,706 722.65,717.13 3.114@722.65,722.4
E_FM: 3.9 XP16_3.2 | length 42.6
  Top Layer w0.254: XP16_3.2@700.59,699.9 715.633,699.9 727.73,711.997 3.9@727.73,722.4
E_GEN: 3.111 XP16_3.16 | length 59.5
  Bottom Layer w0.254: XP16_3.16@682.81,699.9 684.1,701.19 684.1,703.1 684.6,703.6 716.838,703.6 726.46,713.222 3.111@726.46,722.4
E_ID_0: 3.81 RA_2.4
E_ID_1: 3.38 RA_3.4
E_ID_2: 3.80 RA_2.5
E_ID_3: 3.39 RA_3.5
E_ID_4: 3.79 RA_2.6
E_ID_5: 3.40 RA_3.6
E_ID_6: 3.78 RA_2.7
E_ID_7: 3.41 RA_3.7
E_PFI_0: 3.92 XP16_7.1 | length 94.7
  Top Layer w0.254: v1(754,717) 754,709.625 774.825,688.8 820.122,688.8 XP16_7.1@824.882,684.04
  Bottom Layer w0.254: 3.92@753.14,722.46 753.14,717.86 v1(754,717)
E_PFI_1: 3.28 XP16_7.2 | length 97.5
  Top Layer w0.254: 3.28@754.41,722.46 754.41,718.438 753.273,717.301 753.273,709.62 774.547,688.346 819.576,688.346 823.793,684.129 823.793,682.589 XP16_7.2@824.882,681.5
E_PFI_2: 3.90 XP16_5.9 | length 144.2
  Top Layer w0.2: 766.535,698.335 766.771,698.1 v1(768.5,698.1)
  Top Layer w0.254: v1(757.8,716.7) 757.8,707.109 766.555,698.355 ; v1(782.3,698.1) 783.212,698.1 783.309,698.003 784.009,698.003 784.035,698.029 855.238,698.029 860.866,692.401 868.18,692.401 875.63,684.952 XP16_5.9@875.63,684.04
  Bottom Layer w0.2: v1(768.5,698.1) v1(782.3,698.1)
  Bottom Layer w0.254: 3.90@755.68,722.46 755.68,718.82 v1(757.8,716.7)
E_PFI_3: 3.27 XP16_7.4 | length 96.4
  Top Layer w0.254: 3.27@753.14,722.46 753.14,719.374 751.8,718.034 751.8,709.809 774.171,687.438 817.944,687.438 820.891,684.491 820.891,682.951 XP16_7.4@822.342,681.5
E_PFI_4: 3.93 XP16_7.3 | length 93.5
  Top Layer w0.254: v1(752.533,717) 752.533,709.718 774.359,687.892 818.49,687.892 XP16_7.3@822.342,684.04
  Bottom Layer w0.254: 3.93@751.87,722.46 751.87,717.663 v1(752.533,717)
E_PFI_5: 3.89 XP16_6.9
E_PFI_6: 3.31 XP16_6.10
E_PFI_7: 3.30 XP16_5.10 | length 146
  Top Layer w0.2: 766.691,697.576 767.167,697.1 v1(769.4,697.1)
  Top Layer w0.254: 3.30@756.95,722.46 756.95,707.317 766.691,697.576 ; v1(783.8,697.152) 784.223,697.575 855.05,697.575 860.678,691.947 867.081,691.947 874.4,684.628 874.4,682.73 XP16_5.10@875.63,681.5
  Bottom Layer w0.2: v1(769.4,697.1) 769.452,697.152 v1(783.8,697.152)
E_PFI_8: 3.94 XP16_7.5 | length 92.2
  Top Layer w0.254: v1(751.067,717) 751.067,709.901 773.983,686.984 816.858,686.984 XP16_7.5@819.802,684.04
  Bottom Layer w0.254: 3.94@750.6,722.46 750.6,717.467 v1(751.067,717)
E_PFI_9: 3.25 XP16_7.8 | length 94.2
  Top Layer w0.254: 3.25@750.6,722.46 750.6,719.028 748.873,717.301 748.873,710.069 773.32,685.622 814.68,685.622 816.1,684.202 816.1,682.662 XP16_7.8@817.262,681.5
E_PFI_10: 3.29 XP16_4.9 | length 109.3
  Top Layer w0.2: v1(759.9,712.9) 759.839,712.9 759.687,713.052 759.625,712.99 781.04,691.575 837.405,691.575 XP16_4.9@844.94,684.04
  Top Layer w0.254: v1(755.6,716.9) 755.6,722.14 755.8,722.34 3.29@755.68,722.46
  Bottom Layer w0.2: v1(755.6,716.9) 755.874,716.9 759.874,712.9 v1(759.9,712.9)
E_PFI_11: 3.91 XP16_4.10 | length 111.9
  Top Layer w0.2: v1(759.4,711.984) 759.4,711.925 780.15,691.175 837.239,691.175 843.725,684.689 843.725,682.715 XP16_4.10@844.94,681.5
  Bottom Layer w0.2: 3.91@754.41,722.46 754.41,719.215 754.75,718.875 754.75,716.575 759.341,711.984 v1(759.4,711.984)
E_PFI_12: 3.95 XP16_7.7 | length 91.1
  Top Layer w0.254: v1(749.6,717) 749.6,710.083 773.607,686.076 815.226,686.076 XP16_7.7@817.262,684.04
  Bottom Layer w0.254: 3.95@749.33,722.46 749.33,717 v1(749.6,717)
E_PFI_13: 3.26 XP16_7.6 | length 95.3
  Top Layer w0.254: 3.26@751.87,722.46 751.87,718.831 750.34,717.301 750.34,709.985 773.795,686.53 816.312,686.53 818.351,684.491 818.351,682.951 XP16_7.6@819.802,681.5
E_PFI_14: 3.24 XP16_7.9 | length 90
  Top Layer w0.254: 3.24@749.33,722.46 749.33,718.4 748.419,717.489 748.419,709.881 773.171,685.129 813.633,685.129 XP16_7.9@814.722,684.04
E_SENSE: 3.108 XP16_1.10 XP16_2.12 | length 129.3
  Top Layer w0.254: XP16_2.12@687.89,681.5 686.69,682.7 682.4,682.7 679.8,680.1 662.33,680.1 XP16_1.10@660.93,681.5 662.2,682.77 662.2,684.5 671.632,693.932 721.843,693.932 731.387,703.476 v1(731.387,716.687)
  Bottom Layer w0.254: v1(731.387,716.687) 732.82,718.12 3.108@732.82,722.46
E_SUP+: 3.0 C10.1 XP16_1.15 XP16_2.15 | length 134.6
  Top Layer w0.7: XP16_1.15@653.31,684.04 653.31,702.31 664.203,713.203 695.653,713.203 697.95,715.5 C10.1@700.951,715.5 703.55,715.5 704.65,714.4 714.4,714.4 716.3,716.3 3.0@716.3,722.4
  Bottom Layer w0.7: XP16_1.15@653.31,684.04 651.7,682.43 651.7,679.386 654.344,676.742 675.512,676.742 XP16_2.15@682.81,684.04
E_SUP-: 3.119 C7.2 XP16_1.16 XP16_2.16 | length 128.6
  Top Layer w0.7: XP16_2.16@682.81,681.5 680.733,679.423 655.387,679.423 XP16_1.16@653.31,681.5 651.673,683.137 651.673,702.681 664.492,715.5 675.788,715.5 675.806,715.482 692.482,715.482 v1(692.5,715.5)
  Bottom Layer w0.7: v1(692.5,715.5) 714,715.5 716.3,717.8 3.119@716.3,722.4
E_SYNC: 3.110 XP16_3.1 | length 40.7
  Bottom Layer w0.254: XP16_3.1@700.59,702.5 716.868,702.5 727.73,713.362 3.110@727.73,722.4
EAI_0+: 3.107 XP16_1.7 | length 96.4
  Top Layer w0.254: XP16_1.7@663.47,684.04 672.908,693.478 722.031,693.478 733.2,704.647 v1(733.2,716.676)
  Bottom Layer w0.254: v1(733.2,716.676) 734.09,717.566 3.107@734.09,722.46
EAI_0-: 3.12 XP16_1.8 | length 98.9
  Top Layer w0.254: XP16_1.8@663.47,681.5 664.8,682.83 664.8,684.5 673.324,693.024 722.219,693.024 734.09,704.895 3.12@734.09,722.46
EAI_1+: 3.106 XP16_1.5 | length 95
  Top Layer w0.254: XP16_1.5@666.01,684.04 674.54,692.57 722.407,692.57 734.9,705.063 v1@734.9,716.5
  Bottom Layer w0.254: v1(734.9,716.676) 735.36,717.136 3.106@735.36,722.46
EAI_1-: 3.13 XP16_1.6 | length 97.9
  Top Layer w0.254: XP16_1.6@666.01,681.5 667.42,682.91 667.42,684.808 674.728,692.116 722.595,692.116 735.627,705.148 735.627,718.309 735.36,718.576 3.13@735.36,722.46
EAI_2+: 3.105 XP16_1.3 | length 94
  Top Layer w0.254: XP16_1.3@668.55,684.04 676.172,691.662 722.783,691.662 736.6,705.479 v1(736.6,716.676)
  Bottom Layer w0.254: v1@736.5,716.676 736.63,716.806 3.105@736.63,722.46
EAI_2-: 3.14 XP16_1.4 | length 97
  Top Layer w0.254: XP16_1.4@668.55,681.5 669.8,682.75 669.8,684.6 676.408,691.208 722.971,691.208 737.327,705.564 737.327,718.073 736.63,718.77 3.14@736.63,722.46
EAI_3+: 3.104 XP16_1.1 | length 93
  Top Layer w0.254: XP16_1.1@671.09,684.04 677.804,690.754 723.159,690.754 738.3,705.895 v1(738.3,716.676)
  Bottom Layer w0.254: 3.104@737.9,722.46 737.9,717.076 v1(738.3,716.676)
EAI_3-: 3.15 XP16_1.2 | length 95.3
  Top Layer w0.254: XP16_1.2@671.09,681.5 679.89,690.3 723.347,690.3 739.3,706.253 739.3,717 737.9,718.4 3.15@737.9,722.46
EAI_4+: 3.102 XP16_2.7 | length 77.1
  Bottom Layer w0.254: XP16_2.7@692.97,684.04 698.476,689.546 730.874,689.546 740.372,699.043 740.372,722.392 3.102@740.44,722.46
EAI_4-: 3.17 XP16_2.8 | length 80.1
  Top Layer w0.254: 3.17@740.44,722.46 740.44,717.436 741.099,716.778 v1(741.099,716.699)
  Bottom Layer w0.254: XP16_2.8@692.97,681.5 694.2,682.73 694.2,684.628 698.664,689.092 731.062,689.092 740.826,698.855 740.826,716.426 v1(741.099,716.699)
EAI_5+: 3.101 XP16_2.5 XP16_7.15 | length 153.3
  Top Layer w0.254: v1(732.5,688.6) 768.6,688.6 773.16,684.04 XP16_7.15@807.102,684.04
  Bottom Layer w0.254: XP16_2.5@695.51,684.04 699.97,688.5 732.6,688.5 741.873,697.773 741.873,717.527 741.71,717.69 3.101@741.71,722.46
EAI_5-: 3.18 XP16_2.6 XP16_7.14 | length 159.3
  Top Layer w0.254: v1(733.3,687.8) 768.7,687.8 772.914,683.586 802.489,683.586 803.175,682.9 808.242,682.9 XP16_7.14@809.642,681.5 ; 3.18@741.71,722.46 741.71,717.566 v1(742.6,716.676)
  Bottom Layer w0.254: XP16_2.6@695.51,681.5 696.8,682.79 696.8,684.688 699.839,687.727 733.527,687.727 742.6,696.8 v1@742.6,716.502
EAI_6+: 3.100 XP16_2.3 XP16_4.15 | length 184.7
  Top Layer w0.254: v1(734.1,687) 768.8,687 772.668,683.132 802.168,683.132 805.5,679.8 830.558,679.8 830.566,679.808 831.883,679.808 836.115,684.04 XP16_4.15@837.32,684.04
  Bottom Layer w0.254: XP16_2.3@698.05,684.04 700.956,686.946 734.146,686.946 743.327,696.127 743.327,717.418 742.98,717.765 3.100@742.98,722.46
EAI_6-: 3.19 XP16_2.4 XP16_4.14 | length 190
  Top Layer w0.254: v1(734.9,686.2) 768.8,686.2 772.4,682.6 802.058,682.6 805.312,679.346 830.746,679.346 830.754,679.354 832.826,679.354 836.247,682.775 838.585,682.775 XP16_4.14@839.86,681.5 ; 3.19@742.98,722.46 742.98,717.896 v1@744.2,716.676
  Bottom Layer w0.254: XP16_2.4@698.05,681.5 699.31,682.76 699.31,684.648 700.8,686.138 734.991,686.138 744.183,695.331 744.183,716.303
  other v1: 744.099,716.699
EAI_7+: 3.99 XP16_2.1 XP16_5.15 | length 213.9
  Top Layer w0.254: v1(735.699,685.399) 768.901,685.399 772.2,682.1 801.916,682.1 805.141,678.875 v1(833.375,678.875)
  Bottom Layer w0.254: XP16_2.1@700.59,684.04 701.85,685.3 735.6,685.3 v1(735.699,685.399) 744.855,694.555 744.855,717.163 744.25,717.769 3.99@744.25,722.46 ; v1(833.375,678.875) 834.875,678.875 835.202,679.202 863.172,679.202 XP16_5.15@868.01,684.04